# Altium PCB PCB1.PcbDoc
Units mil, origin at the board's own origin, x right, y up, seen from the top; angles counter-clockwise.
Board outline 6000 x 4000 mil, 2 copper layers (Top Layer, Bottom Layer); 12 components, 72 nets, 149 pads, 0 vias.
Unrouted connection lines stored in the file: 4.
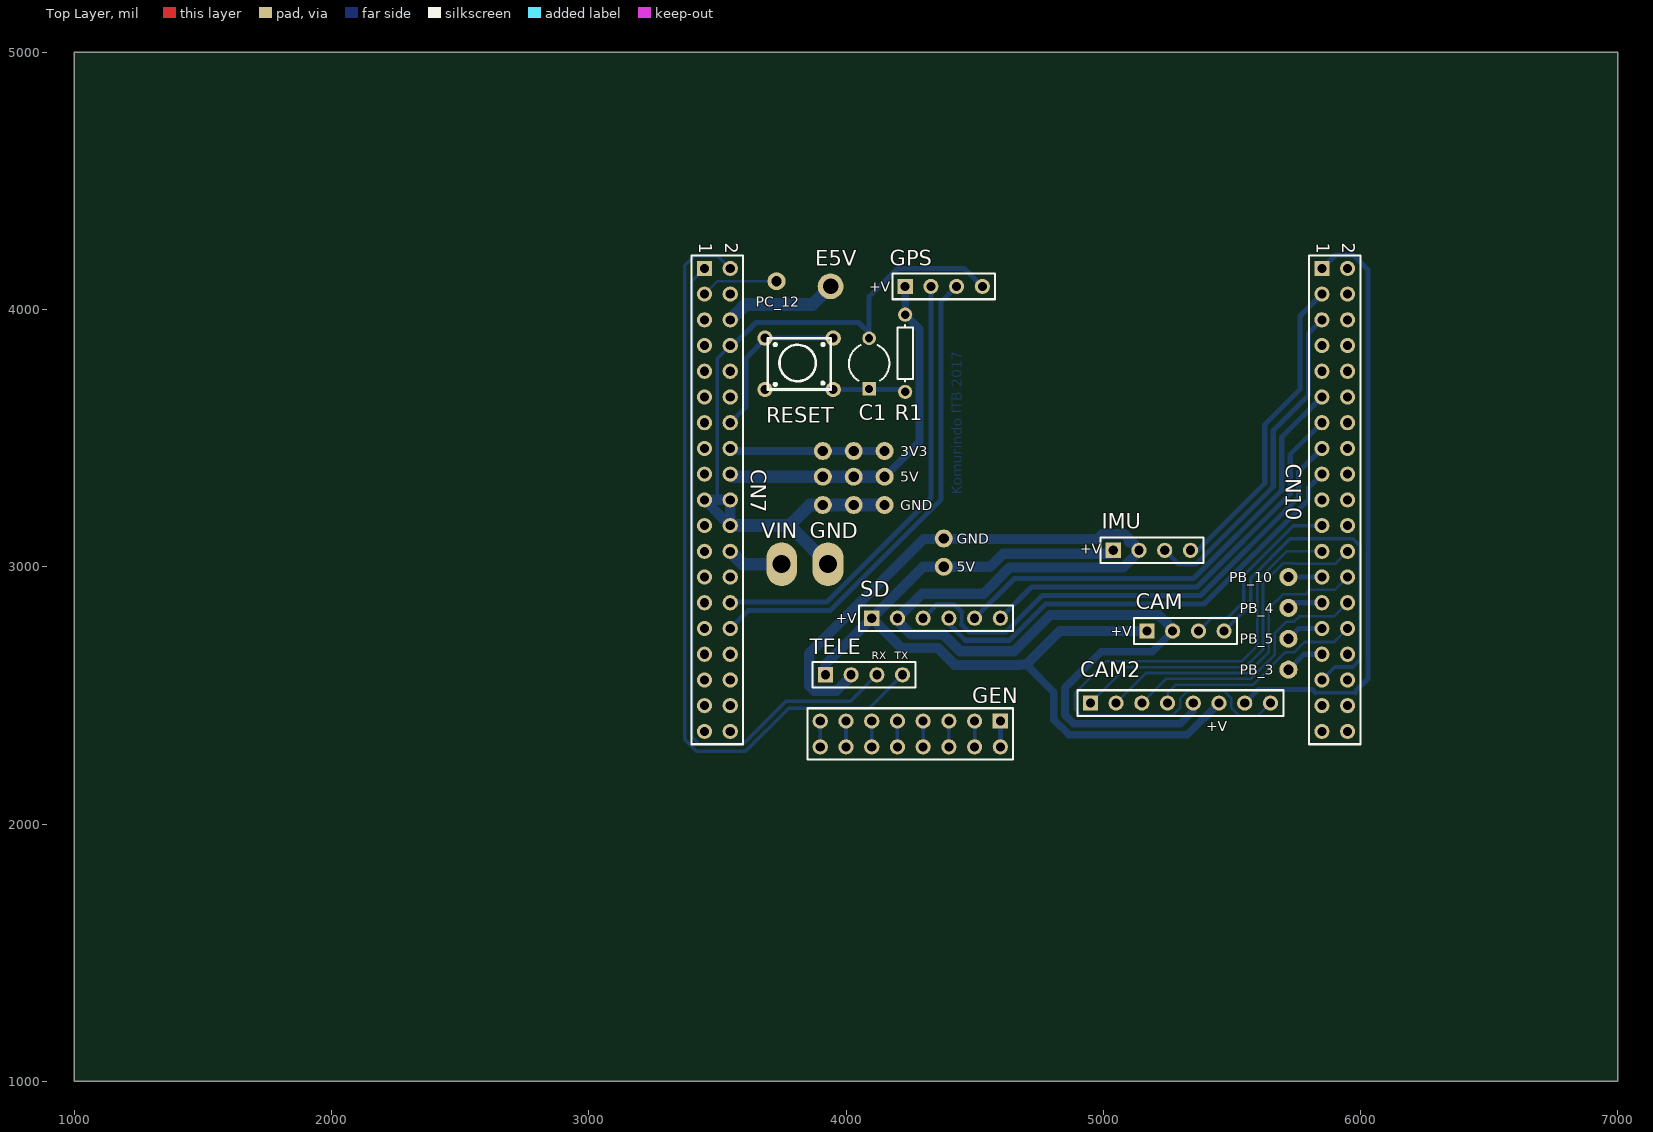
[diagram p0: Top Layer view]
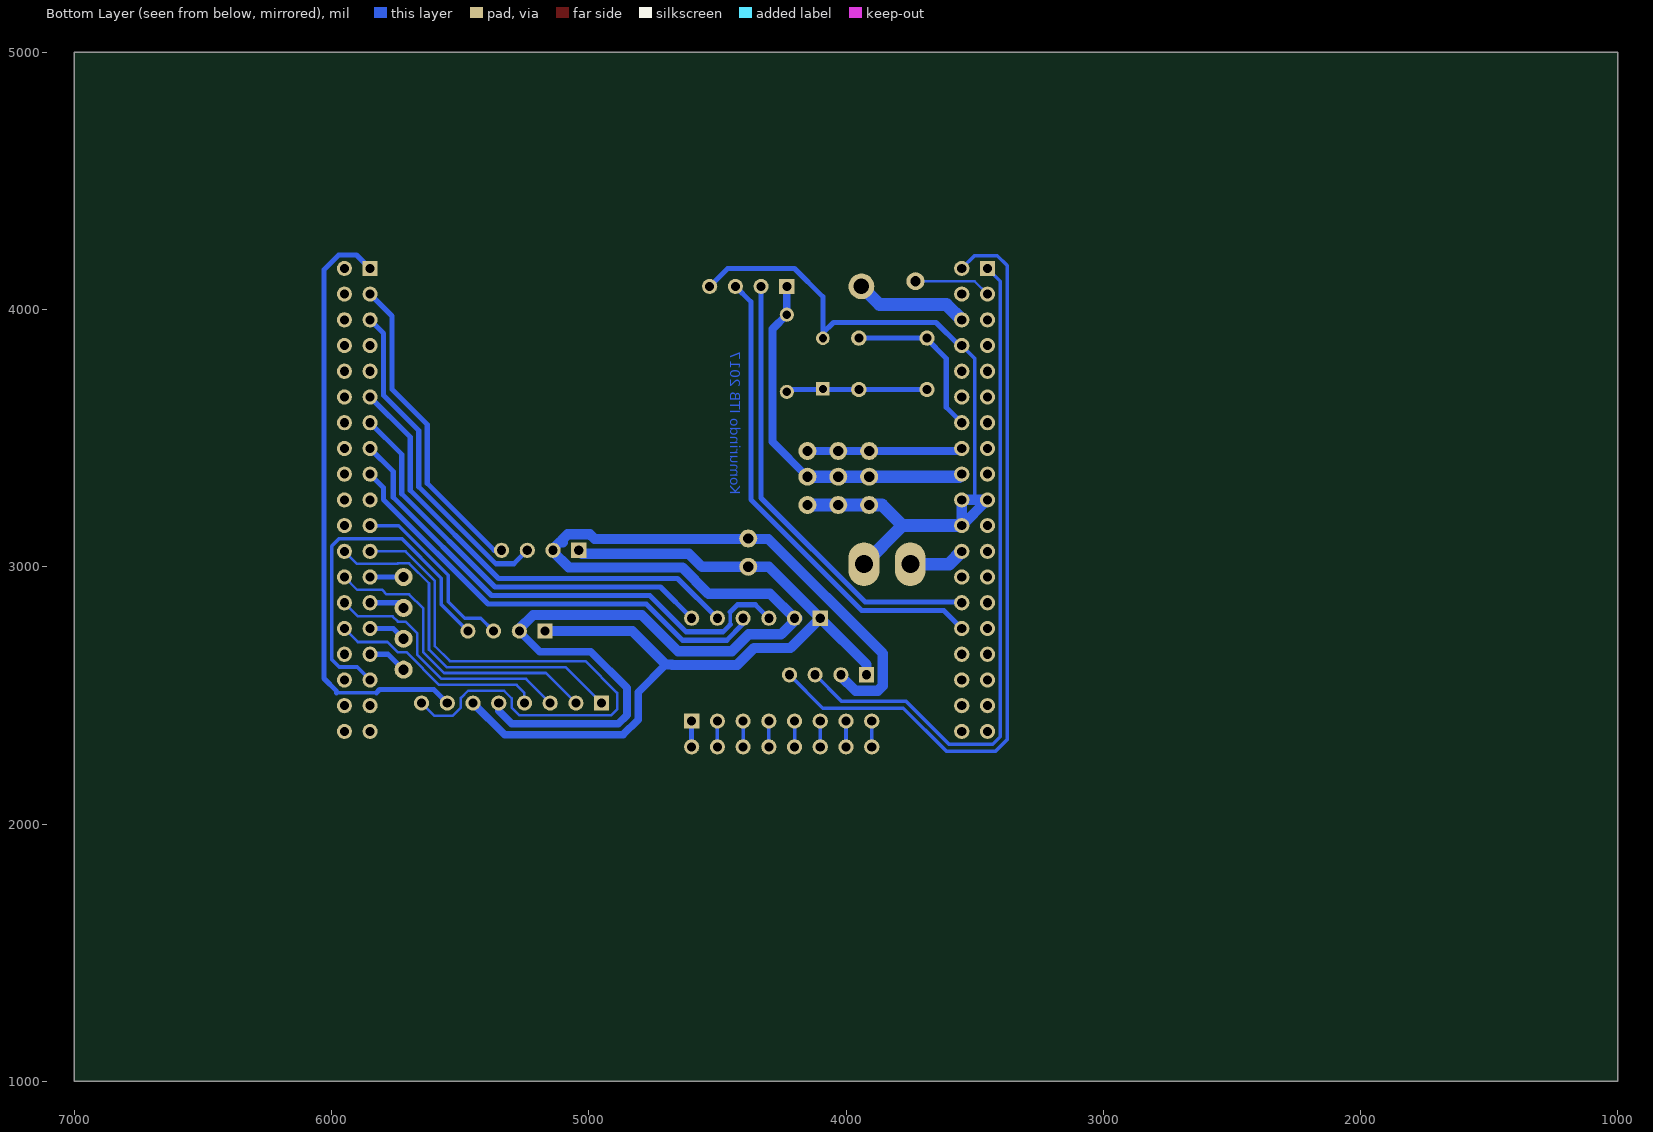
[diagram p1: Bottom Layer view, seen from below]

## Layer stack, top to bottom
Top Solder: solder mask 0.4, Solder Resist, Dk 3.5
Top Layer: signal copper 1.4
Dielectric 1: dielectric 12.6, FR-4, Dk 4.8
Bottom Layer: signal copper 1.4
Bottom Solder: solder mask 0.4, Solder Resist, Dk 3.5

## Board outline
1000,1000 7000,1000 7000,5000 1000,5000

## Design rules (kind name [scope] priority, off if disabled: settings)
Clearance [All] p1: gap=13
PolygonConnect [All] p1: connectstyle=Relief reliefconductorwidth=10 reliefentries=4 polygonreliefangle="90 Angle" airgapwidth=10
RoomDefinition Sheet1 [InComponentClass('Sheet1')] p1: confinementstyle=ConfineIn formatcopy=TRUE lockcomponents=FALSE outline 3330,2210 6080,2210 6080,4280 3330,4280
RoutingVias [All] p1: holewidth=28 width=50 viastyle="Through Hole" minholewidth=28 minwidth=50 maxholewidth=28 maxwidth=50
SolderMaskExpansion [All] p1: expansion=4
Width [All] p1: maxlimit=50 minlimit=10 preferedwidth=20 minimp=50.000000 maximp=50.000000 favimp=50.000000
30 further rules are at their usual default settings.

## Components (designator, comment, footprint, x,y, rotation, side; value= is the part's Value field where it differs from the comment)
C1 "Cap2" CAPR5-4X5 4090,3790 r90 top
CAM "Header 4" HDR1X4 5170,2750 r0 top
CAM2 "Header 8" HDR1X8 4950,2470 r0 top
CN7 "Header 19X2" HDR2X19 3450,4160 r270 top
CN10 "Header 19X2" HDR2X19 5850,4160 r270 top
GEN "Header 8X2" HDR2X8 4600,2400 r180 top
GPS "Header 4" HDR1X4 4230,4090 r0 top
IMU "Header 4" HDR1X4 5039,3064 r0 top
R1 "Res1" AXIAL-0.3 4230,3830 r90 top
RESET "pushbutton" pushbutton 4250,3790 r0 top
SD "Header 6" HDR1X6 4100,2800 r0 top
TELE "Header 4" HDR1X4 3920,2580 r0 top

## Footprints (in the part's own frame and the unit in brackets; to place one, negate y for a bottom-side part, rotate by r counter-clockwise, add the part's x,y. Pads: shape width x height; smd on the part's side, far side on the other; paste and mask are expansions set on the pad)
AXIAL-0.3 [mm] "Axial Device, Thru-Hole; 2 Leads; 0.3 in Pin Spacing"
  round 1.4 hole 0.85: 1(-3.81,0) 2(3.81,0)
  silkscreen extent -2.77,-0.76 2.77,0.76
CAPR5-4X5 [mm] "Capacitor; 2 Leads"
  rect 1.35x1.35 hole 0.8: 1(-2.5,0)
  round 1.35 hole 0.8: 2(2.5,0)
  silkscreen extent -1.69,-2 1.82,2
HDR1X4 [mm] "Connector; Header; 4 Position"
  rect 1.5x1.5 hole 0.9: 1(0,0)
  round 1.5 hole 0.9: 2(2.54,0) 3(5.08,0) 4(7.62,0)
  silkscreen extent -1.27,-1.27 8.89,1.27
HDR1X6 [mm] "Connector; Header; 6 Position"
  rect 1.5x1.5 hole 0.9: 1(0,0)
  round 1.5 hole 0.9: 2(2.54,0) 3(5.08,0) 4(7.62,0) 5(10.16,0) 6(12.7,0)
  silkscreen extent -1.27,-1.27 13.97,1.27
HDR1X8 [mm] "Connector; Header; 8 Position"
  rect 1.5x1.5 hole 0.9: 1(0,0)
  round 1.5 hole 0.9: 2(2.54,0) 3(5.08,0) 4(7.62,0) 5(10.16,0) 6(12.7,0) 7(15.24,0) 8(17.78,0)
  silkscreen extent -1.27,-1.27 19.05,1.27
HDR2X8 [mm] "Connector; Header; 8x2 Position"
  rect 1.5x1.5 hole 0.9: 1(0,0)
  round 1.5 hole 0.9: 2(0,2.54) 3(2.54,0) 4(2.54,2.54) 5(5.08,0) 6(5.08,2.54) 7(7.62,0) 8(7.62,2.54) 9(10.16,0) 10(10.16,2.54) 11(12.7,0) 12(12.7,2.54) 13(15.24,0) 14(15.24,2.54) 15(17.78,0) 16(17.78,2.54)
  silkscreen extent -1.27,-1.27 19.05,3.81
HDR2X19 [mm] "Connector; Header; 19x2 Position"
  rect 1.5x1.5 hole 0.9: 1(0,0)
  round 1.5 hole 0.9: 2(0,2.54) 3(2.54,0) 4(2.54,2.54) 5(5.08,0) 6(5.08,2.54) 7(7.62,0) 8(7.62,2.54) 9(10.16,0) 10(10.16,2.54) 11(12.7,0) 12(12.7,2.54) 13(15.24,0) 14(15.24,2.54) 15(17.78,0) 16(17.78,2.54) 17(20.32,0) 18(20.32,2.54) 19(22.86,0) 20(22.86,2.54) 21(25.4,0) 22(25.4,2.54) 23(27.94,0) 24(27.94,2.54) 25(30.48,0) 26(30.48,2.54) 27(33.02,0) 28(33.02,2.54) 29(35.56,0) 30(35.56,2.54) 31(38.1,0) 32(38.1,2.54) 33(40.64,0) 34(40.64,2.54) 35(43.18,0) 36(43.18,2.54) 37(45.72,0) 38(45.72,2.54)
  silkscreen extent -1.27,-1.27 46.99,3.81
pushbutton [mil]
  round 60 hole 35: 1(-565,-101) 1(-300,-101) 2(-565,99) 2(-300,99)
  silkscreen extent -555,-101 -310,99

## Part data
C1: "Capacitor"
CAM GPS IMU TELE: "Header, 4-Pin"
CAM2: "Header, 8-Pin"
CN7 CN10: "Header, 19-Pin, Dual row"
GEN: "Header, 8-Pin, Dual row"
R1: "Resistor"
SD: "Header, 6-Pin"

## Free pads (board coordinates)
  oval 120x170 hole 70: 0(3930,3010) 1(3750,3010)
  round 70 hole 40: 2(4030,3350) 3(4030,3240) 4(4030,3450) 5(5720,2600) 6(5720,2840) 7(5720,2720) 8(5720,2960) 9(3730,4110) 10(4150,3450) 11(4150,3350) 12(4150,3240) 13(3910,3240) 14(3910,3350) 15(3910,3450) 18(4380,3000) 19(4380,3110)
  round 100 hole 60: 20(3940,4090)

## Nets (pads, with @x,y where several pads share a name; then routed paths per layer and width w, separated by ;. In a path a pad name is that pad's centre, name@x,y a point inside that pad or via, vN(x,y) a via of type N, cw(c..) or ccw(c..) an arc to the next point about the centre after c; other vN are vias at no path point)
3V3: CN7.16 pad.4 pad.10 pad.15 | length 590
  Bottom Layer w30: CN7.16@3560,3450 pad.4 pad.10
5V: CAM2.6 CAM.1 CN7.18 GPS.1 IMU.1 pad.2 pad.11 pad.14 pad.18 R1.2 SD.1 TELE.1 | length 4933.2
  Top Layer w20: R1.2@4230,4000 R1.2@4240,3990
  Bottom Layer w30: pad.11 4285.56,3485.56 4285.56,3924.44 R1.2 ; R1.2@4230,4000 GPS.1 ; 4700,2620 4808,2512 4808,2405.74 4867.27,2346.47 5326.47,2346.47 CAM2.6
  Bottom Layer w40: TELE.1 3920,2620 SD.1 ; 4170,2730 4162.53,2737.47 ; IMU.1 5025.53,3050.53 4610.53,3050.53 4560,3000 4300,3000 SD.1 ; CAM.1 4830,2750 4700,2620 4676.72,2620 4675.19,2618.47 4422.34,2618.47 4356.34,2684.47 4215.53,2684.47 4162.53,2737.47 ; SD.1 4162.53,2737.47
  Bottom Layer w50: CN7.18@3560,3350 pad.2 pad.11
AGND: CN10.32
AVDD: CN10.7
BOOT0: CN7.7
E5V: CN7.6 pad.20 | length 448.7
  Bottom Layer w30: CN7.6 CN7.6@3554.85,3960
  Bottom Layer w50: CN7.6 3610,4020 3870,4020 pad.20
GND: C1.2 CAM2.5 CAM.2 CN7.8 CN7.19 CN7.20 CN7.22 CN10.9 CN10.20 GPS.4 IMU.2 pad.0 pad.3 pad.12 pad.13 pad.19 SD.2 TELE.2 | length 8358.4
  Top Layer w20: CN7.8 CN7.8@3560,3860
  Bottom Layer w14: 3500,3260 3500,3810 CN7.8
  Bottom Layer w20: CN7.8@3560,3860 3650,3950 4048.43,3950 4090,3908.43 4090,4050 4200,4160 4460,4160 GPS.4 ; CAM.2 CAM.2@5270,2759.06
  Bottom Layer w30: CAM.2 5190,2670 4992.43,2670 4851,2528.57 4851,2423.55 4885.08,2389.47 5299.47,2389.47 5350,2440 CAM2.5
  Bottom Layer w40: TELE.2 4020,2574.28 3963.2,2517.47 3876.8,2517.47 3857.47,2536.8 3857.47,2663.2 4302.28,3108 4977.28,3108 4995.8,3126.53 5082.2,3126.53 5101.53,3107.2 5101.53,3095 5113.72,3095 5139,3069.72 IMU.2 5139,3058.28 5078.25,2997.53 4636.72,2997.53 4534.72,2895.53 4295.53,2895.53 SD.2 4190,2800 4252.53,2737.47 4378.29,2737.47 4444.29,2671.47 4653.24,2671.47 4794.29,2812.53 5216.53,2812.53 CAM.2@5270,2759.06 ; CN7.19 3500,3260 CN7.20 CN7.22 CN7.19
  Bottom Layer w50: CN7.22 3780,3160 ; pad.0 3780,3160 ; pad.12 pad.3 3860,3240 3780,3160
IOREF: CN7.12
NetC1_1: C1.1 R1.1 RESET.1 | length 536
  Bottom Layer w20: RESET.1@3705,3689 3970,3689 R1.1@4241,3689
NetGEN_1: GEN.1 GEN.2 | length 100
  Bottom Layer w20: GEN.2 GEN.1
NetGEN_3: GEN.3 GEN.4 | length 100
  Bottom Layer w14: GEN.4 GEN.3
NetGEN_5: GEN.5 GEN.6 | length 100
  Bottom Layer w14: GEN.6 GEN.5
NetGEN_7: GEN.7 GEN.8 | length 100
  Bottom Layer w14: GEN.8 GEN.7
NetGEN_9: GEN.9 GEN.10 | length 100
  Bottom Layer w14: GEN.10 GEN.9
NetGEN_11: GEN.11 GEN.12 | length 100
  Bottom Layer w14: GEN.12 GEN.11
NetGEN_13: GEN.13 GEN.14 | length 100
  Bottom Layer w14: GEN.14 GEN.13
NetGEN_15: GEN.15 GEN.16 | length 100
  Bottom Layer w14: GEN.16 GEN.15
PA_0: CN7.28 GPS.2 | length 1771.2
  Bottom Layer w20: CN7.28 3553,2863 3925.38,2863 4330,3267.62 GPS.2
PA_1: CN7.30 GPS.3 | length 1881.4
  Bottom Layer w20: CN7.30 3620,2830 3939.05,2830 4370,3260.95 4370,4030 GPS.3
PA_2: CN10.35 | length 10
  Bottom Layer w14: CN10.35@5850,2450 CN10.35
PA_3: CN10.37
PA_4: CN7.32
PA_5: CN10.11 SD.5 | length 1845.7
  Bottom Layer w20: SD.5@4500,2811.21 SD.5 4654.53,2954.53 5351.07,2954.53 5694,3297.45 5694,3504 CN10.11 CN10.11@5850,3652.72
PA_6: CN10.13 SD.6 | length 1654.6
  Bottom Layer w20: SD.6 4721.53,2921.53 5364.74,2921.53 5727,3283.78 5727,3437 CN10.13
PA_7: CN10.15 SD.3 | length 1997.8
  Bottom Layer w14: 4450,2775 4450,2824.29
  Bottom Layer w20: SD.3 4352.53,2852.53 4421.76,2852.53 4450,2824.29 ; 4450,2775 4477.53,2747.47 4621.76,2747.47 4762.81,2888.53 5378.41,2888.53 5760,3270.11 5760,3370 CN10.15
PA_8: CAM2.8 CN10.23 | length 2314.8
  Bottom Layer w10: CAM2.8 5600,2420 5530,2420 5497.53,2452.47 5497.53,2489.69 5469.21,2518 5329.11,2518 5300,2488.89 5300,2452.79 5269.69,2422.47 4913.02,2422.47 4890,2445.49 4890,2510 5013,2633 5540,2633 5598,2691 5598,2945.48 5712.52,3060 CN10.23
PA_9: CAM.3 CN10.21 | length 710.1
  Bottom Layer w14: CAM.3 5420,2800 5481.82,2800 5546,2864.18 5546,2967.02 5738.98,3160 CN10.21
PA_10: CAM.4 CN10.33 | length 1374.2
  Bottom Layer w14: CAM.4 5573,2853 5573,2955.84 5726.69,3109.53 5970.52,3109.53 5999.53,3080.51 5999.53,2639.49 5970.52,2610.47 5900.47,2610.47 CN10.33
PA_11: CN10.14
PA_12: CN10.12
PA_13: CN7.13
PA_14: CN7.15
PA_15: CN7.17
PB_0: CN7.34
PB_1: CAM2.1 CN10.24 | length 1405.8
  Bottom Layer w10: CAM2.1@4960,2470 CAM2.1 5090,2610 5552.82,2610 5621,2678.18 5621,2935.95 5698.05,3013 5741.95,3013 5742.48,3012.47 5902.47,3012.47 CN10.24
PB_2: CN10.22
PB_3: CN10.31 pad.5 | length 154.9
  Bottom Layer w20: pad.5 5780,2660 CN10.31
PB_4: CN10.27 pad.6 | length 138.3
  Bottom Layer w20: pad.6 5740,2860 CN10.27
PB_5: CN10.29 pad.7 | length 146.6
  Bottom Layer w20: pad.7 5760,2760 CN10.29
PB_6: CN10.17 SD.4 | length 1792.8
  Bottom Layer w20: SD.4 4400,2778.33 4463.86,2714.47 4635.43,2714.47 4776.48,2855.53 5392.08,2855.53 5797.47,3260.92 5797.47,3307.47 CN10.17
PB_7: CN7.21
PB_8: CN10.3 IMU.4 | length 1224.2
  Bottom Layer w20: IMU.4 5367.21,3064 5628,3324.79 5628,3553.53 5764.47,3690 5764.47,3974.47 CN10.3
PB_9: CN10.5 IMU.3 | length 1296.2
  Bottom Layer w20: IMU.3 5291.53,3011.47 5358.65,3011.47 5360,3010.12 5661,3311.12 5661,3530 5797.47,3666.47 5797.47,3907.47 CN10.5
PB_10: CN10.25 pad.8 | length 130
  Bottom Layer w20: pad.8 CN10.25
PB_12: CN10.16
PB_13: CAM2.4 CN10.30 | length 843.6
  Bottom Layer w10: CAM2.4 5250,2510 5281,2541 5581.4,2541 5707.4,2667 5741.95,2667 5782.48,2707.53 5897.53,2707.53 CN10.30
PB_14: CAM2.3 CN10.28 | length 1020.1
  Bottom Layer w10: CAM2.3@5150,2480 CAM2.3 5244,2564 5571.88,2564 5667,2659.12 5667,2741.95 5712.05,2787 5741.95,2787 5762.48,2807.53 5897.53,2807.53 CN10.28
PB_15: CAM2.2 CN10.26 | length 1202.7
  Bottom Layer w10: CAM2.2 5167,2587 5562.35,2587 5644,2668.65 5644,2838.95 5698.05,2893 5785.52,2893 5802.52,2910 5900,2910 CN10.26
PC_0: CN7.38
PC_1: CN7.36
PC_2: CN7.35
PC_3: CN7.37
PC_4: CN10.34
PC_5: CN10.6
PC_6: CN10.4
PC_7: CN10.19
PC_8: CN10.2
PC_9: CAM2.7 CN10.1 | length 2347.4
  Bottom Layer w14: 5825.71,2510 5980,2510
  Bottom Layer w20: CAM2.7 5602.53,2522.53 5813.19,2522.53 5825.71,2510 ; CN10.1 5902.53,4212.53 5971.76,4212.53 6029.53,4154.76 6029.53,2565.24 5980,2515.71 5980,2510
PC_10: CN7.1 TELE.3 | length 2684.2
  Bottom Layer w14: CN7.1 3400.47,4110.47 3400.47,2339.49 3429.49,2310.47 3599.53,2310.47 3766.53,2477.47 4017.47,2477.47 TELE.3
PC_11: CN7.2 TELE.4 | length 3043.5
  Bottom Layer w14: CN7.2 3500.47,4209.53 3412.19,4209.53 3373.47,4170.81 3373.47,2328.3 3418.3,2283.47 3610.71,2283.47 3777.71,2450.47 4090.47,2450.47 TELE.4
PC_12: CN7.3 pad.9 | length 300.7
  Bottom Layer w10: CN7.3 3500,4110 pad.9
PC_13: CN7.23
PC_14: CN7.25
PC_15: CN7.27
PD_2: CN7.4
PH_0: CN7.29
PH_1: CN7.31
RESET: CN7.14 RESET.2 | length 667.6
  Bottom Layer w20: CN7.14 3610,3620 3610,3810 3689,3889 RESET.2@3970,3889
U5V: CN10.8
VBAT: CN7.33
VDD: CN7.5
VIN: CN7.24 pad.1 | length 220.7
  Bottom Layer w50: CN7.24 3600,3010 pad.1
pads on no net: CN7.9 CN7.10 CN7.11 CN7.26 CN10.10 CN10.18 CN10.36 CN10.38

## Other copper
Bottom Layer:
  text "Komurindo ITB 2017" at 4450,3280 h40 r90

## Silkscreen, mask and mechanical layers (free items; w line width, h text height)
Top Overlay:
  text "E5V" at 3880,4170 h60
  text "+V" at 4090,4070 h40
  text "PC_12" at 3650,4010 h40
  text "3V3" at 4210,3430 h40
  text "5V" at 4210,3330 h40
  text "GND" at 4210,3220 h40
  text "VIN" at 3670,3110 h60
  text "GND" at 3860,3110 h60
  text "GND" at 4430,3090 h40
  text "+V" at 4910,3050 h40
  text "5V" at 4430,2980 h40
  text "PB_10" at 5490,2940 h40
  text "PB_4" at 5530,2820 h40
  text "+V" at 3960,2780 h40
  text "+V" at 5030,2730 h40
  text "PB_5" at 5530,2700 h40
  text "RX" at 4100,2640 h30
  text "TX" at 4190,2640 h30
  text "PB_3" at 5530,2580 h40
  text "+V" at 5400,2360 h40

## Text inside footprints (layer, text, board x,y; h text height)
CN7: Top Overlay "2" at 3530,4260 h50 r270; Top Overlay "1" at 3430,4260 h50 r270
CN10: Top Overlay "2" at 5930,4260 h50 r270; Top Overlay "1" at 5830,4260 h50 r270